# Altium PCB PCB1.PcbDoc
Units mm, origin at the board's own origin, x right, y up, seen from the top; angles counter-clockwise.
Board outline 78 x 50 mm, 2 copper layers (Top Layer, Bottom Layer); 18 components, 11 nets, 46 pads, 0 vias.
Unrouted connection lines stored in the file: 25.
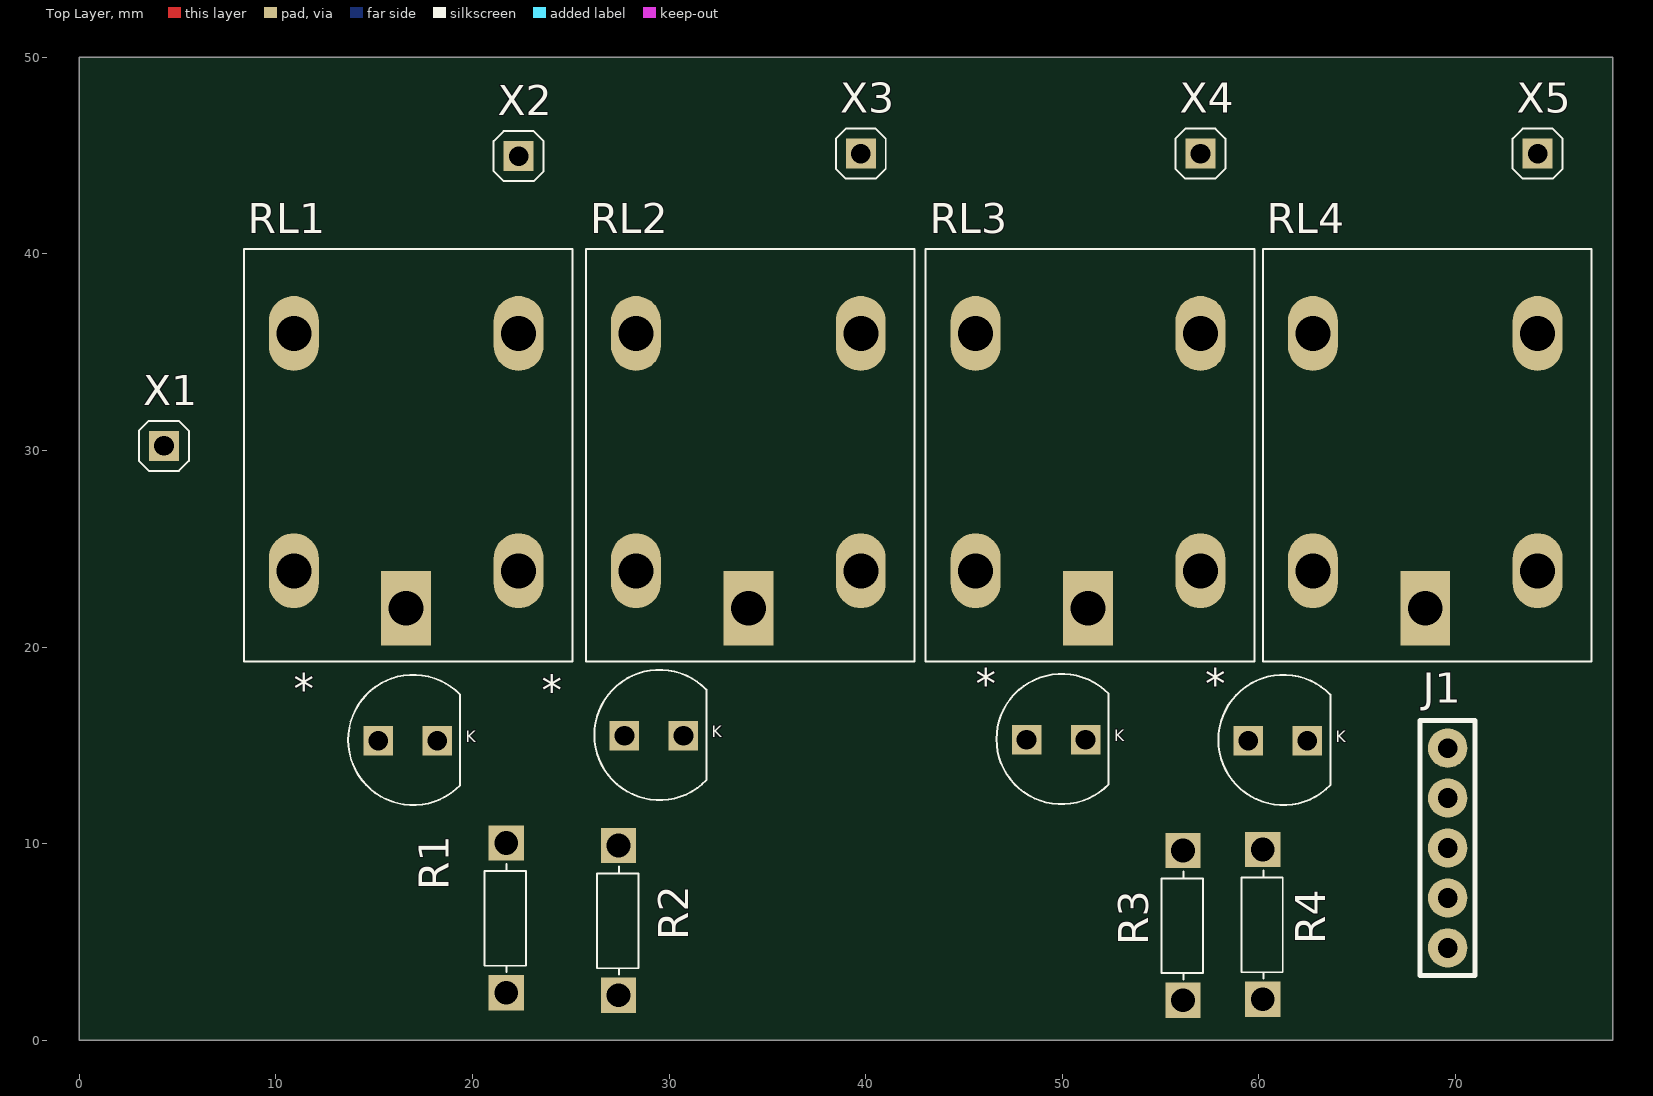
[diagram p0: Top Layer view]
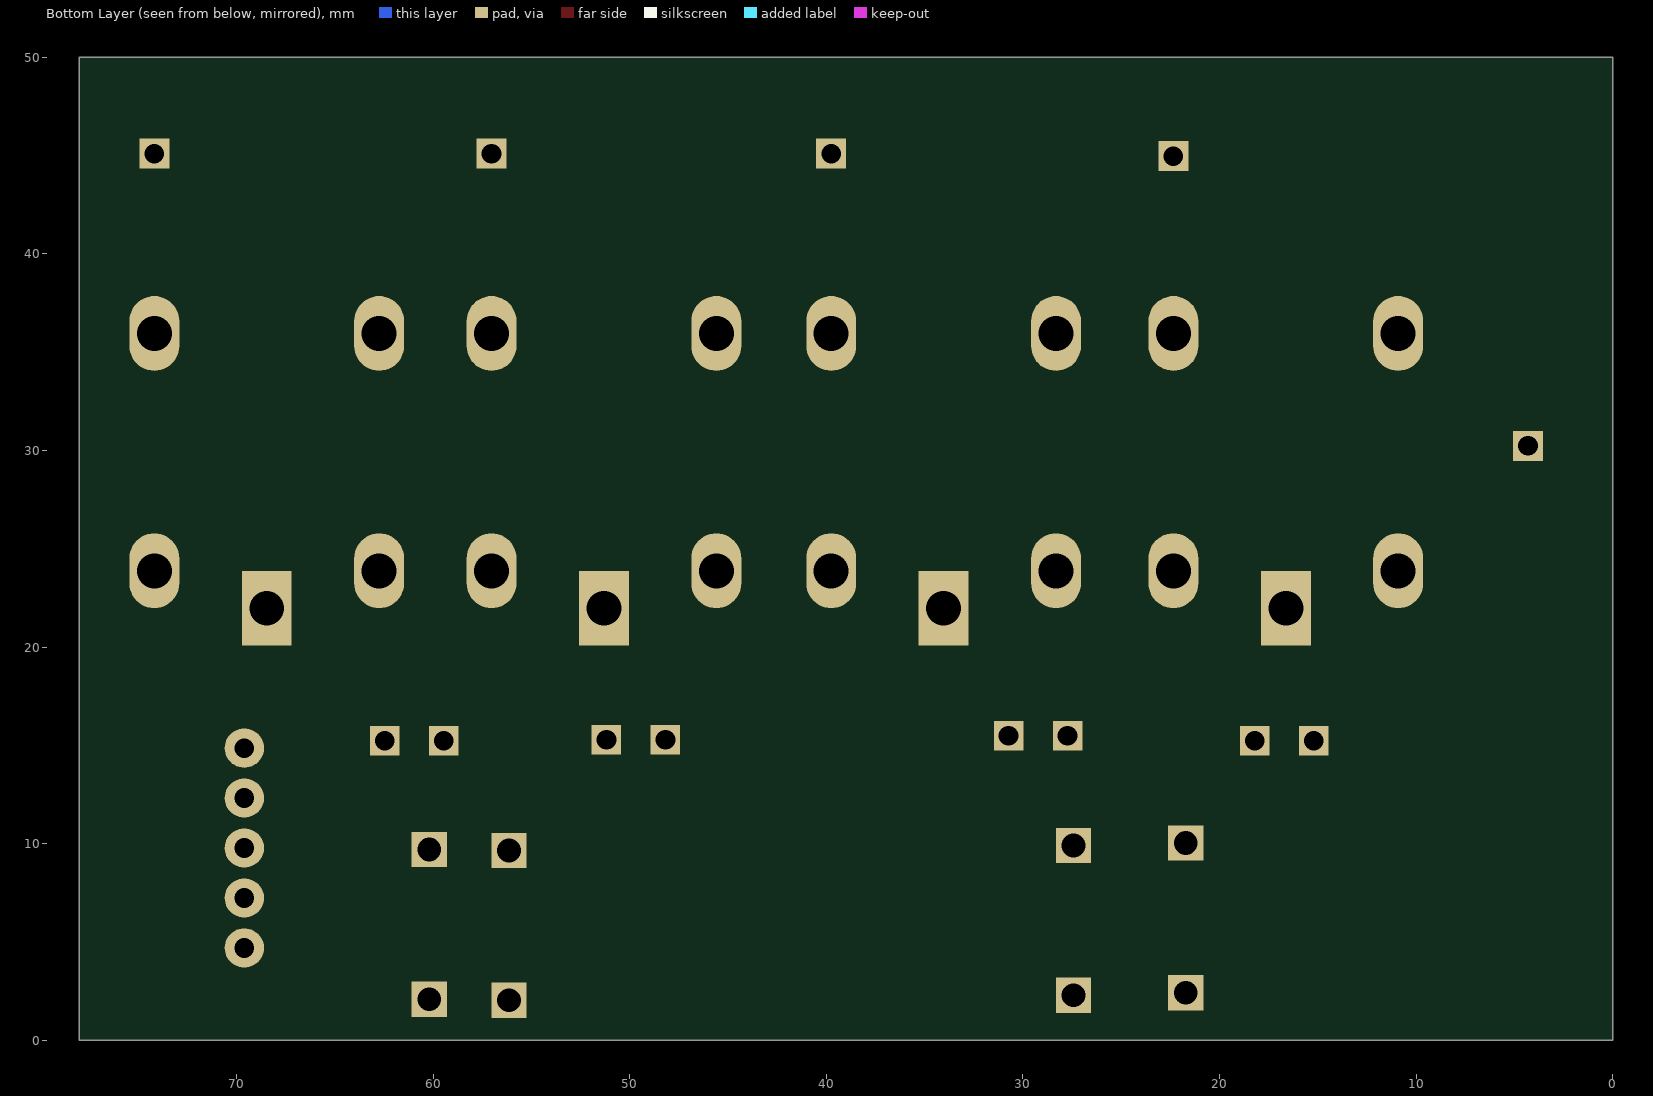
[diagram p1: Bottom Layer view, seen from below]

## Layer stack, top to bottom
Top Solder: solder mask 0.0102, Solder Resist, Dk 3.5
Top Layer: signal copper 0.0356
Dielectric 1: dielectric 0.32, FR-4, Dk 4.8
Bottom Layer: signal copper 0.0356
Bottom Solder: solder mask 0.0102, Solder Resist, Dk 3.5

## Board outline
0,0 78,0 78,50 0,50

## Design rules (kind name [scope] priority, off if disabled: settings)
Clearance [All] p1: gap=0.254 ignorepadtopadclearanceinfootprint=FALSE except(0: Arc-Hole Track-Hole SMDPad-Hole THPad-Hole Via-Hole Fill-Hole Poly-Hole Region-Hole Text-Hole)
PolygonConnect [All] p1: connectstyle=Relief reliefconductorwidth=0.254 reliefentries=4 polygonreliefangle="90 Angle" airgapwidth=0.254
RoutingVias [All] p1: holewidth=0.711 width=1.27 viastyle="Through Hole" minholewidth=0.711 minwidth=1.27 maxholewidth=0.711 maxwidth=1.27
SolderMaskExpansion [All] p1: expansion=0.102
Width [All] p1: maxlimit=0.254 minlimit=0.254 preferedwidth=0.254
30 further rules are at their usual default settings.

## Classes and differential pairs
component class rele_Sheet: * J1 R1 R2 R3 R4 RL1 RL2 RL3 RL4 X1 X2 X3 X4 X5

## Components (designator, comment, footprint, x,y, rotation, side; value= is the part's Value field where it differs from the comment)
* "LED_AXIAL_3MM" LED_AXIAL_3MM 29.234,15.494 r0 top value=?
* "LED_AXIAL_3MM" LED_AXIAL_3MM 16.712,15.24 r0 top value=?
* "LED_AXIAL_3MM" LED_AXIAL_3MM 49.681,15.284 r0 top value=?
* "LED_AXIAL_3MM" LED_AXIAL_3MM 60.96,15.24 r0 top value=?
J1 "flat cable" "Pin Header 5 Ways" 69.596,4.699 r90 top
R1 "?" RES_PTH_7.62MM 21.717,6.223 r90 top
R2 "?" RES_PTH_7.62MM 27.432,6.096 r90 top
R3 "?" RES_PTH_7.62MM 56.134,5.842 r90 top
R4 "?" RES_PTH_7.62MM 60.198,5.892 r90 top
RL1 "RELEICR5551" DIV_RELE_5551 16.637,28.956 r270 top
RL2 "RELEICR5551" DIV_RELE_5551 34.036,28.956 r270 top
RL3 "RELEICR5551" DIV_RELE_5551 51.308,28.956 r270 top
RL4 "RELEICR5551" DIV_RELE_5551 68.453,28.956 r270 top
X1 "HEADER_1X1" HEADER_1X1 4.318,30.226 r0 top value=?
X2 "HEADER_1X1" HEADER_1X1 22.352,44.958 r0 top value=?
X3 "HEADER_1X1" HEADER_1X1 39.751,45.085 r0 top value=?
X4 "HEADER_1X1" HEADER_1X1 57.023,45.085 r0 top value=?
X5 "HEADER_1X1" HEADER_1X1 74.168,45.085 r0 top value=?

## Footprints (in the part's own frame and the unit in brackets; to place one, negate y for a bottom-side part, rotate by r counter-clockwise, add the part's x,y. Pads: shape width x height; smd on the part's side, far side on the other; paste and mask are expansions set on the pad)
DIV_RELE_5551 [mil]
  rect 150x100 hole 70: 1(275,0)
  oval 150x100 hole 70: 2(-275,-225) 3(-275,225) 4(200,225) 5(200,-225)
  silkscreen extent -444,-325 382,333, body extent -425,-310 343,316, height 87
HEADER_1X1 [mil]
  rect 60x60 hole 39.37: 1(0,0)
  silkscreen extent -50,-50 50,50, body extent -51,-50 49,50, height 237
LED_AXIAL_3MM [mm]
  rect 1.5x1.5 hole 1: A(-1.5,0) K(1.5,0)
  silkscreen extent -3.03,-3.28 2.67,3.34, body extent -1.98,-1.96 1.52,2.04, height 5.6
"Pin Header 5 Ways" [mm] "Connector Header 5 ways PTH 0.100\" (2.54mm)"
  round 2 hole 1: 1(0,0) 2(2.54,0) 3(5.08,0) 4(7.62,0) 5(10.16,0)
  silkscreen extent -1.4,-1.4 11.56,1.4, body extent -1.27,-1.27 11.43,1.27, height 10.11
RES_PTH_7.62MM [mm]
  rect 1.8x1.8 hole 1.2: 1(-3.81,0) 2(3.81,0)
  silkscreen extent -2.76,-1.01 2.76,1.09, body extent -4.06,-1.15 4.16,1.25, height 3.2

## Part data
J1: library part "Pin Header 5 ways", "Connector Header PTH 0.100\" (2.54mm)", Manufacturer 1="Irwin Inc.", Manufacturer 1 PN=M20-9992046
R1 R2 R3 R4: library part RES_PTH_7.62MM, "Pin Through Hole Resistor 7.62mm"
X1 X2 X3 X4 X5: "1X1"

## Nets (pads, with @x,y where several pads share a name; then routed paths per layer and width w, separated by ;. In a path a pad name is that pad's centre, name@x,y a point inside that pad or via, vN(x,y) a via of type N, cw(c..) or ccw(c..) an arc to the next point about the centre after c; other vN are vias at no path point)
Fase: RL1.1 RL2.1 RL3.1 RL4.1 X1.1
GND: J1.1 R1.1 R2.1 R3.1 R4.1 RL1.5 RL2.5 RL3.5 RL4.5
Net*_K: *.K@18.212,15.24 R3.2
T1_fase: RL1.3 X2.1
T2_fase: RL2.3 X3.1
T3_fase: RL3.3 X4.1
T4_fase: RL4.3 X5.1
Tomada1: *.A@15.212,15.24 J1.2 RL1.4
Tomada2: *.A@27.734,15.494 J1.3 RL2.4
Tomada3: *.A@48.181,15.284 J1.4 RL3.4
Tomada4: *.A@59.46,15.24 J1.5 RL4.4
pads on no net: *.K@30.734,15.494 *.K@51.181,15.284 *.K@62.46,15.24 R1.2 R2.2 R4.2 RL1.2 RL2.2 RL3.2 RL4.2

## Silkscreen, mask and mechanical layers (free items; w line width, h text height)
Mechanical 1:
  circle w0.254: c6.223,5.588 r4
  circle w0.254: c45.085,4.953 r4
  circle w0.254: c35.052,4.318 r2
  circle w0.254: c15.748,4.318 r2
  circle w0.254: c65.786,45.847 r2
  circle w0.254: c3.937,45.847 r2
  lines w0.254: 0,0 0,50 78,50 78,0 0,0

## Text inside footprints (layer, text, board x,y; h text height)
*: Top Overlay "K" at 19.658,14.961 h1
*: Top Overlay "K" at 32.18,15.215 h1
*: Top Overlay "K" at 52.627,15.005 h1
*: Top Overlay "K" at 63.906,14.961 h1